# Altium PCB SPSGRFpcb.PcbDoc
Units mm, origin at the board's own origin, x right, y up, seen from the top; angles counter-clockwise.
Board outline 30.28 x 30.25 mm, 2 copper layers (Top Layer, Bottom Layer); 3 components, 11 nets, 23 pads, 0 vias.
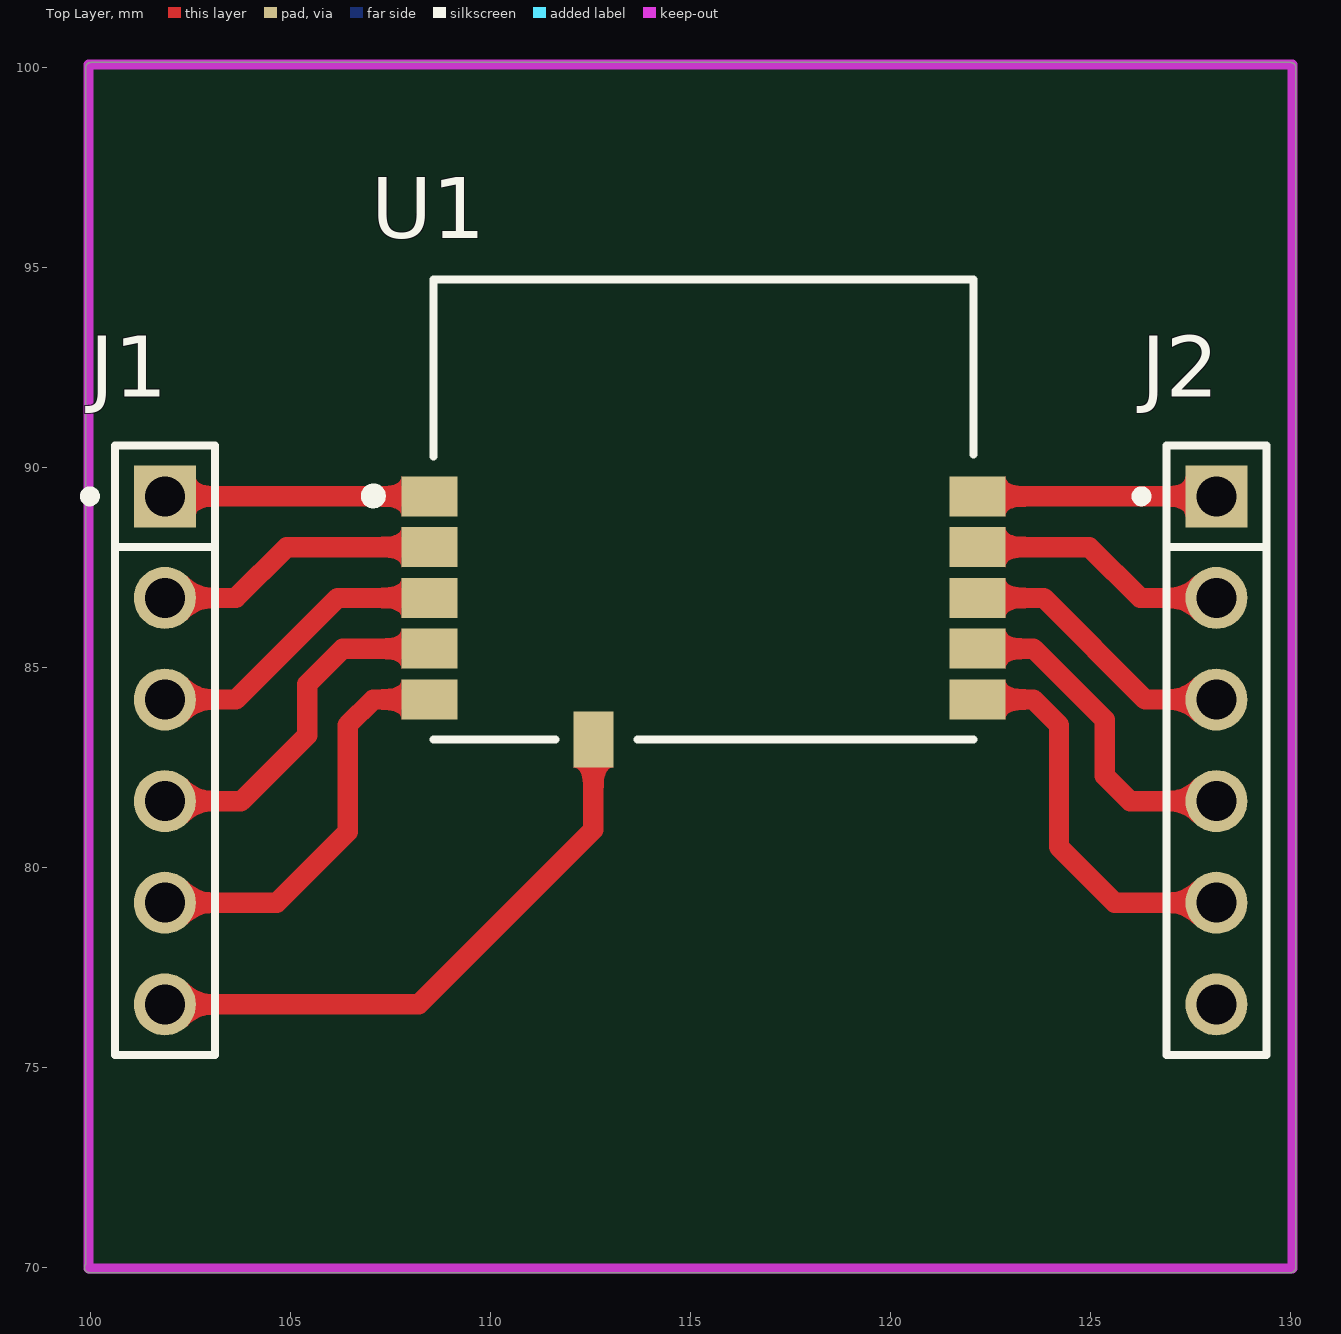
[diagram p0: Top Layer view]
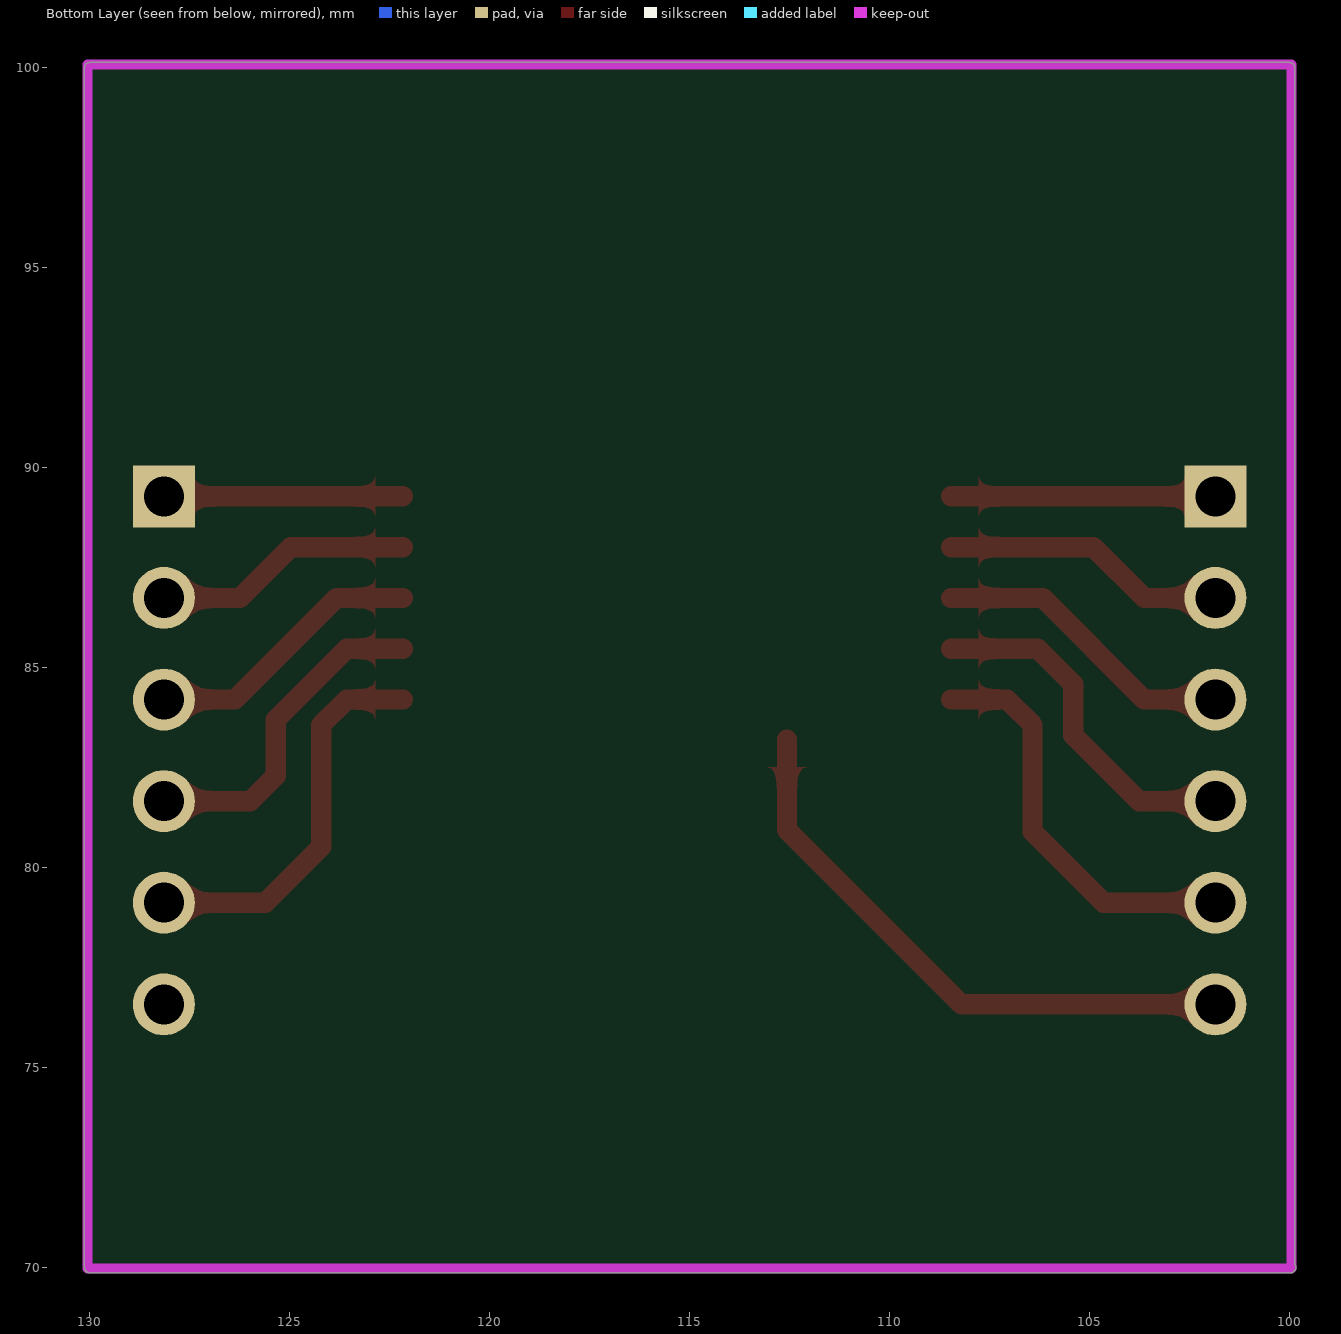
[diagram p1: Bottom Layer view, seen from below]
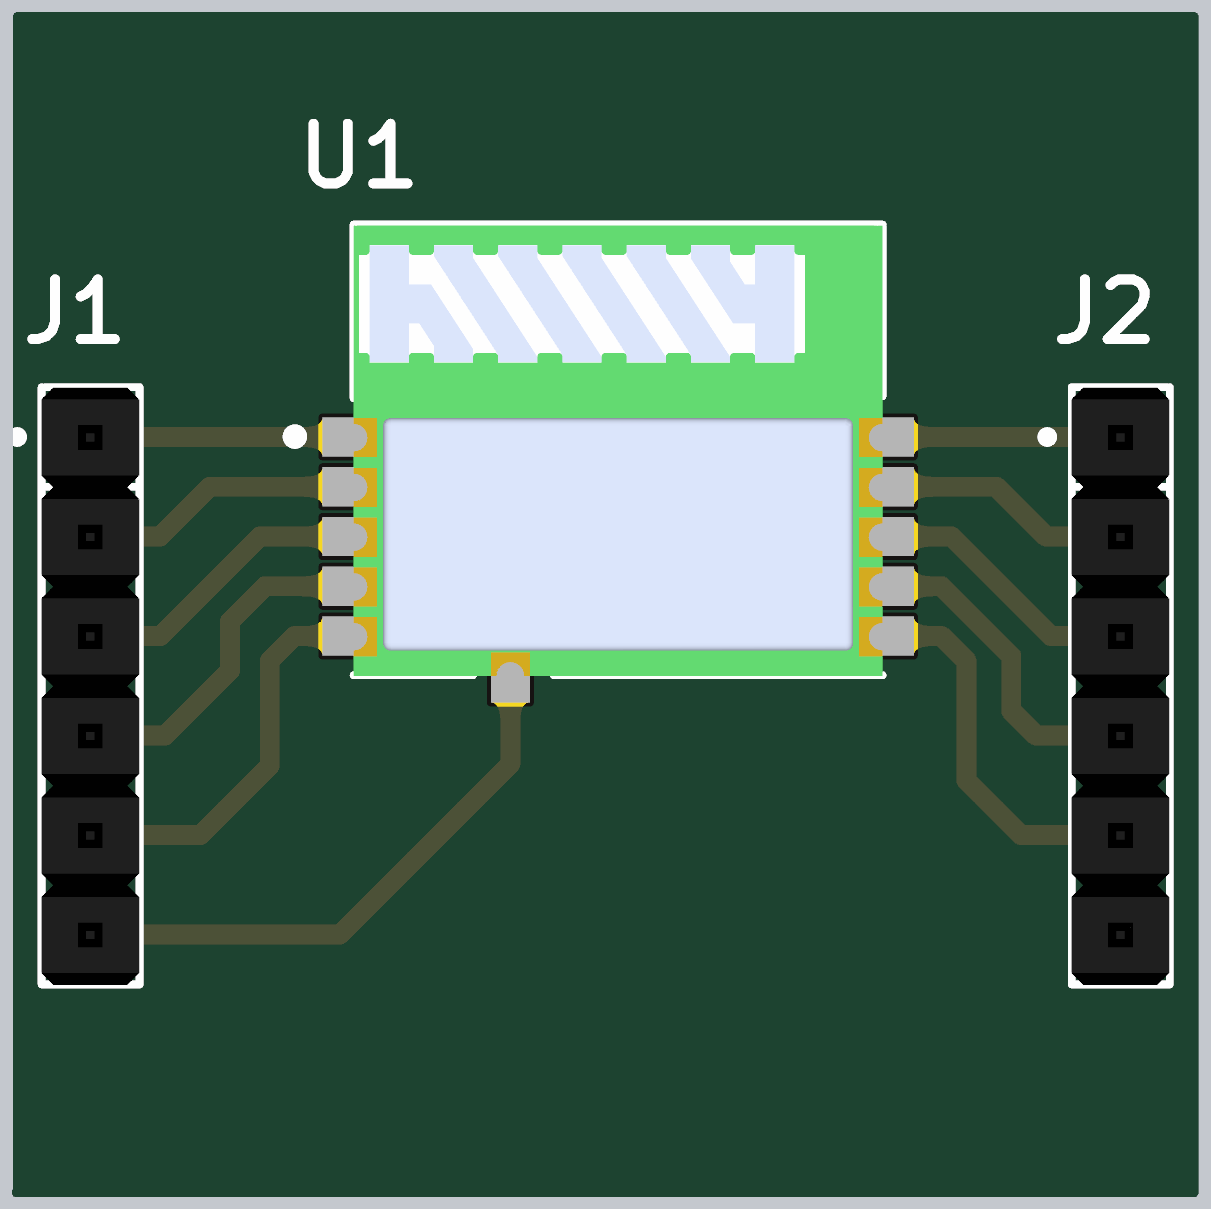
[diagram p2: 3D render of the assembled board from above, using the file's embedded part models]

## Layer stack, top to bottom
Top Solder: solder mask 0.0102, Solder Resist, Dk 3.5
Top Layer: signal copper 0.0356
Dielectric 1: dielectric 0.32, FR-4, Dk 4.8
Bottom Layer: signal copper 0.0356
Bottom Solder: solder mask 0.0102, Solder Resist, Dk 3.5

## Board outline
99.972,69.873 cw(c99.972,70) 99.873,70.08 99.873,100 cw(c100,100) 100,100.127 130,100.127 cw(c130,100) 130.127,100 130.127,70 cw(c130,70) 129.986,69.873 cw(c129.972,70) 129.972,69.873
cut-out: 94.488,74.549

## Design rules (kind name [scope] priority, off if disabled: settings)
Clearance [All] p1: gap=0.254 ignorepadtopadclearanceinfootprint=FALSE except(0: Arc-Hole Track-Hole SMDPad-Hole THPad-Hole Via-Hole Fill-Hole Poly-Hole Region-Hole Text-Hole)
MinimumSolderMaskSliver [All] p1: minsoldermaskwidth=0.01
PolygonConnect [All] p1: connectstyle=Relief reliefconductorwidth=0.254 reliefentries=4 polygonreliefangle="90 Angle" airgapwidth=0.254
RoutingVias [All] p1: holewidth=0.711 width=1.27 viastyle="Through Hole" minholewidth=0.711 minwidth=1.27 maxholewidth=0.711 maxwidth=1.27
SilkToSilkClearance [All] p1: silktosilkclearance=0.025
SolderMaskExpansion [All] p1: expansion=0.102
Width [All] p1: maxlimit=1 minlimit=0.254 preferedwidth=0.254
28 further rules are at their usual default settings.

## Components (designator, comment, footprint, x,y, rotation, side; value= is the part's Value field where it differs from the comment)
J1 "Conn_TE_826629-6_eec" TE_C-826629_0 101.854,82.931 r0 top
J2 "Conn_TE_826629-6_eec" TE_C-826629_0 128.143,82.931 r0 top
U1 "SPSGRF-868" XCVR_SPSGRF-868 115.316,86.741 r0 top

## Footprints (in the part's own frame and the unit in brackets; to place one, negate y for a bottom-side part, rotate by r counter-clockwise, add the part's x,y. Pads: shape width x height; smd on the part's side, far side on the other; paste and mask are expansions set on the pad)
TE_C-826629_0 [mm]
  rect 1.55x1.55 hole 1 paste-1000 mask+0: 1(0,6.35)
  round 1.55 hole 1 paste-1000 mask+0: 2(0,3.81) 3(0,1.27) 4(0,-1.27) 5(0,-3.81) 6(0,-6.35)
  silkscreen extent -2,-7.62 1.25,7.62, body extent -1.26,-7.63 1.24,7.61, height 9.51
XCVR_SPSGRF-868 [mm]
  rect 1.4x1 smd: 1(-6.85,2.54) 2(-6.85,1.27) 3(-6.85,0) 4(-6.85,-1.27) 5(-6.85,-2.54) 7(6.85,-2.54) 8(6.85,-1.27) 9(6.85,0) 10(6.85,1.27) 11(6.85,2.54)
  rect 1x1.4 smd: 6(-2.75,-3.54)
  silkscreen extent -8.46,-3.54 6.75,7.96, body extent -6.75,-3.56 6.75,7.94, height 2

## Part data
J1: "CONN HEADER BRKWAWAY 6POS AU", Digikey Part Number=A121495-ND, Manufacturer=TE, Mfg Package Ident=C-826629, Mouser Part Number=571-826629-6, Part Number="Header 1", Temperature=to, ComponentLink1Description=Upverter, ComponentLink1URL=https://upverter.com/upn/revision/017f1bdfe55378c0/, ComponentLink2Description=Datasheet, ComponentLink2URL=http://www.te.com/commerce/DocumentDelivery/DDEController?Action=srchrtrv&DocNm=826629&DocType=Customer+Drawing&DocLang=English&DocFormat=pdf&PartCntxt=826629-6, Digikey Description="CONN HEADER BRKWAWAY 6POS AU", helpURL=https://upverter.com/upn/revision/017f1bdfe55378c0/, Ipc Land Pattern Name=SIP250W63P254L1524H711Q6, Lead Free=yes, Num Pins=6, Package=C-826629, Price=0.393365307724, RoHS=TRUE, Supplier 1=Digi-Key, Supplier 2=Mouser, Supplier Part Number 1=A121495-ND, Supplier Part Number 2=571-826629-6, Symbol 0 0=Standard, Type="integrated circuit"
J2: "CONN HEADER BRKWAWAY 6POS AU", Digikey Part Number=A121495-ND, Manufacturer=TE, Mfg Package Ident=C-826629, Mouser Part Number=571-826629-6, Part Number="Header 2", Temperature=to, ComponentLink1Description=Upverter, ComponentLink1URL=https://upverter.com/upn/revision/017f1bdfe55378c0/, ComponentLink2Description=Datasheet, ComponentLink2URL=http://www.te.com/commerce/DocumentDelivery/DDEController?Action=srchrtrv&DocNm=826629&DocType=Customer+Drawing&DocLang=English&DocFormat=pdf&PartCntxt=826629-6, Digikey Description="CONN HEADER BRKWAWAY 6POS AU", helpURL=https://upverter.com/upn/revision/017f1bdfe55378c0/, Ipc Land Pattern Name=SIP250W63P254L1524H711Q6, Lead Free=yes, Num Pins=6, Package=C-826629, Price=0.393365307724, RoHS=TRUE, Supplier 1=Digi-Key, Supplier 2=Mouser, Supplier Part Number 1=A121495-ND, Supplier Part Number 2=571-826629-6, Symbol 0 0=Standard, Type="integrated circuit"
U1: "Módulo transceptor general ISM <1 GHz 868 MHz integrado, montaje en superficie de chip", Package="Module STMicroelectronics", Availability=Good, MF=STMicroelectronics, MP=SPSGRF-868, Price=None, Purchase-URL=https://pricing.snapeda.com/search/part/SPSGRF-868/?ref=eda, SnapEDA_Link=https://www.snapeda.com/parts/SPSGRF-868/STMicroelectronics/view-part/478626/?ref=snap

## Nets (pads, with @x,y where several pads share a name; then routed paths per layer and width w, separated by ;. In a path a pad name is that pad's centre, name@x,y a point inside that pad or via, vN(x,y) a via of type N, cw(c..) or ccw(c..) an arc to the next point about the centre after c; other vN are vias at no path point)
CLK: J2.5 U1.7 | length 9.9
  Top Layer w0.508: U1.7 123.571,84.201 124.206,83.566 124.206,80.518 125.603,79.121 J2.5
CS: J2.2 U1.10 | length 6.5
  Top Layer w0.508: U1.10 124.968,88.011 126.238,86.741 J2.2
GP0: J1.4 U1.4 | length 8.9
  Top Layer w0.508: J1.4 103.759,81.661 105.41,83.312 105.41,84.582 106.299,85.471 U1.4
GP1: J1.3 U1.3 | length 7.7
  Top Layer w0.508: J1.3 103.632,84.201 106.172,86.741 U1.3
GP2: J1.2 U1.2 | length 7.1
  Top Layer w0.508: J1.2 103.632,86.741 104.902,88.011 U1.2
GP3: J1.1 U1.1 | length 6.6
  Top Layer w0.508: J1.1 U1.1
Ground: J1.6 U1.6 | length 14.8
  Top Layer w0.508: J1.6 108.204,76.581 112.566,80.943 U1.6
MISO: J2.4 U1.8 | length 8.4
  Top Layer w0.508: U1.8 123.571,85.471 125.349,83.693 125.349,82.296 125.984,81.661 J2.4
MOSI: J2.3 U1.9 | length 7
  Top Layer w0.508: U1.9 123.825,86.741 126.365,84.201 J2.3
SDN: J2.1 U1.11 | length 6
  Top Layer w0.508: U1.11 J2.1
V3.3: J1.5 U1.5 | length 10.3
  Top Layer w0.508: J1.5 104.648,79.121 106.426,80.899 106.426,83.566 107.061,84.201 U1.5
pads on no net: J2.6

## Keep-outs
Keep-Out Layer:
  lines w0.254: 99.949,69.977 130.048,69.977 130.048,100.076 99.949,100.076 99.949,71.501 99.949,69.977